# EAGLE board 4x4_keyboard_2.1 (EAGLE 9.6.2)
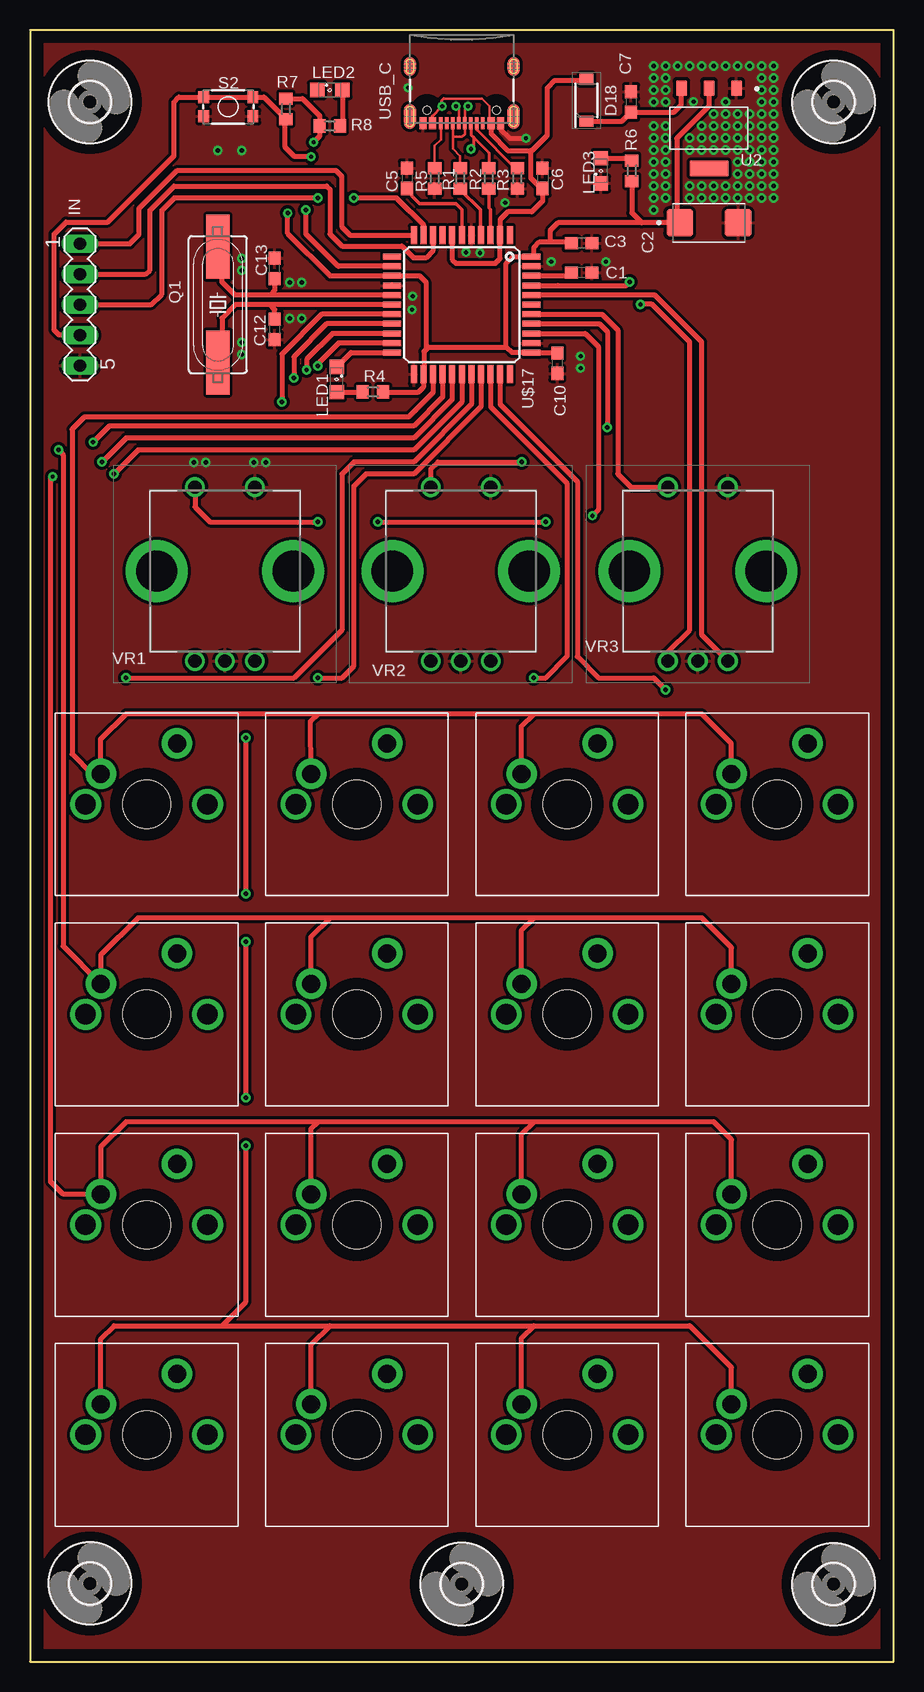
[diagram p0: board, top side]
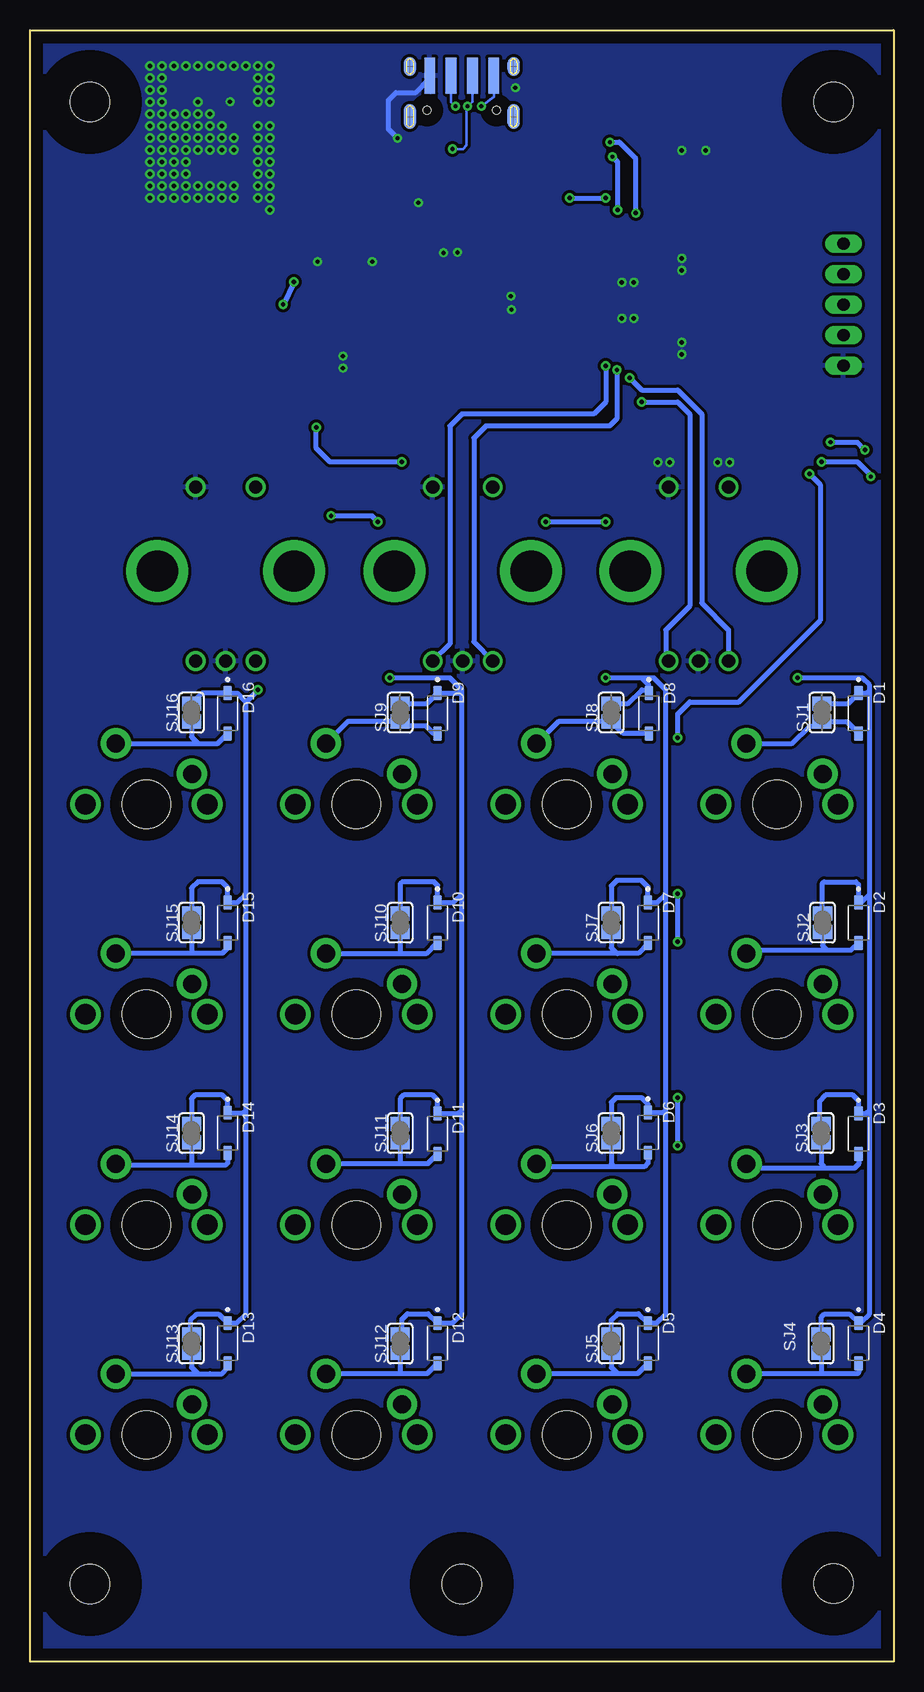
[diagram p1: board, bottom side, seen from below]

Size 72 x 136 mm. Coordinates in mm from the lower left corner, seen from the top.
Outline: 0,136 0,0 72,0 72,136 0,136
Copper layers (1*16): Top 0.035mm / dielectric 1.5mm / Bottom 0.035mm
Design rules "default": minimum track width 6mil, minimum drill 0.35mm, track to track 6mil, track to pad 6mil, pad to pad 6mil, via to via 6mil, smd to smd 6mil, copper to edge 40mil, drill to drill 6mil, minimum pad ring 10mil, minimum via ring 8mil, stop-mask expansion 4mil, vias tented up to drill 0mil, thermal gap 10mil

## Footprints (pad centres in the part's own frame; a part is rotated, then mirrored left to right if it is on the bottom)
C0603 = smd 1.1 x 1: 1 -0.85,0; 2 0.85,0
CAPPM6032X280N = smd 2.24 x 2.32: 1 -2.435,0; 2 2.435,0
SOD3715X135N = smd 1.21 x 0.73: A 1.68,0; C -1.68,0
SODFL3818X130N = smd 0.92 x 1.13: 1 -1.75,0; 2 1.75,0
3,3 = hole 3.3: 0,0
MA05-1 = drill 1.016 long: 1 -5.08,0; 2 -2.54,0; 3 0,0; 4 2.54,0; 5 5.08,0
USB-SOLDER-PADS = smd 3 x 0.9: D+ 0,-0.889; D- 0,0.889; GND 0,-2.667; VBUS 0,2.667
SML0805 = smd 1.2 x 1.2: A 1.05,0; C -1.05,0
HC49UP = smd 5.334 x 1.93: 1 -4.826,0; 2 4.826,0
R0603 = smd 1 x 1.1: 1 -0.85,0; 2 0.85,0
TACTILE_SWITCH_SMD_4.6X2.8MM = smd 0.9 x 1: 1 -2.05,-0.8; 2 2.05,-0.8; 3 2.05,0.8; 4 -2.05,0.8
SJ = smd 1.168 x 1.6: 1 -0.762,0; 2 0.762,0
SOT229P700X180-4N = smd 0.93 x 1.31: 1 -2.29,-3.345; 2 0,-3.345; 3 2.29,-3.345 | smd 3.24 x 1.31: 4 0,3.345
CHERRY-MX = drill 1.714 pad 1.93: P$3 -5.08,0; P$4 5.08,0 | drill 1.5 pad 2.54: SW1 -3.81,2.54; SW2 2.54,5.08 | hole 4: 0,0
TQFP44 = smd 1.5 x 0.5: 1 -5.8,4; 2 -5.8,3.2; 3 -5.8,2.4; 4 -5.8,1.6; 5 -5.8,0.8; 6 -5.8,0; 7 -5.8,-0.8; 8 -5.8,-1.6; 9 -5.8,-2.4; 10 -5.8,-3.2; 11 -5.8,-4; 23 5.8,-4; 24 5.8,-3.2; 25 5.8,-2.4; 26 5.8,-1.6; 27 5.8,-0.8; 28 5.8,0; 29 5.8,0.8; 30 5.8,1.6; 31 5.8,2.4; 32 5.8,3.2; 33 5.8,4 | smd 0.5 x 1.5: 12 -4,-5.8; 13 -3.2,-5.8; 14 -2.4,-5.8; 15 -1.6,-5.8; 16 -0.8,-5.8; 17 0,-5.8; 18 0.8,-5.8; 19 1.6,-5.8; 20 2.4,-5.8; 21 3.2,-5.8; 22 4,-5.8; 34 4,5.8; 35 3.2,5.8; 36 2.4,5.8; 37 1.6,5.8; 38 0.8,5.8; 39 0,5.8; 40 -0.8,5.8; 41 -1.6,5.8; 42 -2.4,5.8; 43 -3.2,5.8; 44 -4,5.8
USB-C-16P-5 = smd 0.3 x 1: A5 -1.25,-0.34; A6 -0.25,-0.34; A7 0.25,-0.34; A8 1.25,-0.34; B5 1.75,-0.34; B6 0.75,-0.34; B7 -0.75,-0.34; B8 -1.75,-0.34 | smd 0.6 x 1: GND -3.225,-0.34; GND2 3.225,-0.34; VBUS1 -2.45,-0.34; VBUS2 2.45,-0.34 | smd 1 x 2.1: SHLD1 -4.32,-0.915; SHLD2 4.32,-0.915 | smd 1 x 2.1 bottom: SHLD3 -4.32,-0.915; SHLD4 4.32,-0.915 | smd 1 x 1.6: SHLD5 -4.32,-5.095; SHLD8 4.32,-5.095 | smd 1 x 1.6 bottom: SHLD6 -4.32,-5.095; SHLD7 4.32,-5.095 | hole 0.65: -2.89,-1.445; 2.89,-1.445
PEC11R4220FS0024 = drill 1.1 pad 1.65: 1 0,0; 2 5,0; A1 0,-14.5; B1 5,-14.5; C1 2.5,-14.5 | drill 3.441 pad 5.161: MH1 -3.2,-7; MH2 8.2,-7

## Placement (x,y rotation side)
C1  0.1uF  [C0603]  46,115.78 180 top
C2  TAJC226K025RNJ  [CAPPM6032X280N]  56.61,119.93 0 top
C3  0.1uF  [C0603]  46,118.23 180 top
C5  1.0uF  [C0603]  31.43,123.64 270 top
C6  1.0uF  [C0603]  42.73,123.64 270 top
C7  10uF  [C0603]  50.11,130 270 top
C10  1.0uF  [C0603]  43.97,108.22 90 top
C12  22pF  [C0603]  20.4,111.04 270 top
C13  22pF  [C0603]  20.4,116.12 90 top
D1  1N4148W-13-F  [SOD3715X135N]  2.92,79.04 270 bottom
D2  1N4148W-13-F  [SOD3715X135N]  2.92,61.59 270 bottom
D3  1N4148W-13-F  [SOD3715X135N]  2.92,43.99 270 bottom
D4  1N4148W-13-F  [SOD3715X135N]  2.92,26.53 270 bottom
D5  1N4148W-13-F  [SOD3715X135N]  20.48,26.53 270 bottom
D6  1N4148W-13-F  [SOD3715X135N]  20.48,44.1 270 bottom
D7  1N4148W-13-F  [SOD3715X135N]  20.48,61.59 270 bottom
D8  1N4148W-13-F  [SOD3715X135N]  20.4,79.04 270 bottom
D9  1N4148W-13-F  [SOD3715X135N]  38.02,79.04 270 bottom
D10  1N4148W-13-F  [SOD3715X135N]  38.02,61.59 270 bottom
D11  1N4148W-13-F  [SOD3715X135N]  38.02,44 270 bottom
D12  1N4148W-13-F  [SOD3715X135N]  38.02,26.53 270 bottom
D13  1N4148W-13-F  [SOD3715X135N]  55.52,26.53 270 bottom
D14  1N4148W-13-F  [SOD3715X135N]  55.52,44.07 270 bottom
D15  1N4148W-13-F  [SOD3715X135N]  55.52,61.59 270 bottom
D16  1N4148W-13-F  [SOD3715X135N]  55.52,79.04 270 bottom
D18  1N4007W-T  [SODFL3818X130N]  46.4,130.13 90 top
H1  MOUNT-HOLE3.3  [3,3]  67,130 0 top
H2  MOUNT-HOLE3.3  [3,3]  5,130 0 top
H4  MOUNT-HOLE3.3  [3,3]  67,6.45 0 top
H5  MOUNT-HOLE3.3  [3,3]  5,6.51 0 top
H6  MOUNT-HOLE3.3  [3,3]  36,6.46 0 top
IN  [MA05-1]  4.17,113.11 270 top
JP14  USB_SOLDER_PADS  [USB-SOLDER-PADS]  36,132.21 270 bottom
LED1  Green  [SML0805]  25.57,106.86 270 top
LED2  Green  [SML0805]  25,131 0 top
LED3  [SML0805]  47.59,124.26 90 top
Q1  [HC49UP]  15.66,113.11 270 top
R1  5.1k  [R0603]  35.87,123.64 90 top
R2  5.1k  [R0603]  38.25,123.64 90 top
R3  5.1k  [R0603]  40.63,123.64 270 top
R4  1K  [R0603]  28.59,105.83 180 top
R5  5.1k  [R0603]  33.75,123.64 270 top
R6  1K  [R0603]  50.17,124.26 270 top
R7  1K  [R0603]  21.34,129.42 90 top
R8  1K  [R0603]  25,128 0 top
S2  Reset  [TACTILE_SWITCH_SMD_4.6X2.8MM]  16.53,129.6 0 top
SJ1  [SJ]  5.97,79.1 90 bottom
SJ2  [SJ]  5.91,61.59 90 bottom
SJ3  [SJ]  6.04,44.04 90 bottom
SJ4  [SJ]  6.04,26.5 90 bottom
SJ5  [SJ]  23.54,26.5 90 bottom
SJ6  [SJ]  23.54,44.04 90 bottom
SJ7  [SJ]  23.54,61.59 90 bottom
SJ8  [SJ]  23.54,79.1 90 bottom
SJ9  [SJ]  41.13,79.1 90 bottom
SJ10  [SJ]  41.13,61.59 90 bottom
SJ11  [SJ]  41.13,44.04 90 bottom
SJ12  [SJ]  41.13,26.5 90 bottom
SJ13  [SJ]  58.53,26.5 90 bottom
SJ14  [SJ]  58.53,44.04 90 bottom
SJ15  [SJ]  58.53,61.59 90 bottom
SJ16  [SJ]  58.53,79.1 90 bottom
U2  AMS1117-5.0  [SOT229P700X180-4N]  56.61,127.8 180 top
U$1  CHERRY-MX  [CHERRY-MX]  9.72,71.45 0 top
U$2  CHERRY-MX  [CHERRY-MX]  27.25,71.45 0 top
U$3  CHERRY-MX  [CHERRY-MX]  44.79,71.45 0 top
U$4  CHERRY-MX  [CHERRY-MX]  62.3,71.45 0 top
U$5  CHERRY-MX  [CHERRY-MX]  9.72,53.95 0 top
U$6  CHERRY-MX  [CHERRY-MX]  27.25,53.95 0 top
U$7  CHERRY-MX  [CHERRY-MX]  44.79,53.95 0 top
U$8  CHERRY-MX  [CHERRY-MX]  62.3,53.95 0 top
U$9  CHERRY-MX  [CHERRY-MX]  9.72,36.4 0 top
U$10  CHERRY-MX  [CHERRY-MX]  27.25,36.4 0 top
U$11  CHERRY-MX  [CHERRY-MX]  44.79,36.4 0 top
U$12  CHERRY-MX  [CHERRY-MX]  62.3,36.4 0 top
U$13  CHERRY-MX  [CHERRY-MX]  9.72,18.9 0 top
U$14  CHERRY-MX  [CHERRY-MX]  27.25,18.9 0 top
U$15  CHERRY-MX  [CHERRY-MX]  44.79,18.9 0 top
U$16  CHERRY-MX  [CHERRY-MX]  62.3,18.9 0 top
U$17  32U4  [TQFP44]  36,113.11 270 top
USB_C  [USB-C-16P-5]  36,127.87 180 top
VR1  PEC11R-4220F-S0024  [PEC11R4220FS0024]  13.75,97.9 0 top
VR2  PEC11R-4220F-S0024  [PEC11R4220FS0024]  33.42,97.9 0 top
VR3  PEC11R-4220F-S0024  [PEC11R4220FS0024]  53.18,97.9 0 top

## Library data of the parts
C1 C3 C5-C7 C10 C12 C13 = rcl; SPICEPREFIX: C
C2 = TAJC226K025RNJ; AVAILABILITY: In Stock; DESCRIPTION: 22 µF Molded Tantalum Capacitors 25 V 2312 (6032 Metric) 1.4Ohm; MF: AVX Interconnect / Elco; MP: TAJC226K025RNJ; PACKAGE: 2312 AVX Interconnect / Elco; PRICE: None; PURCHASE-URL: https://pricing.snapeda.com/search/part/TAJC226K025RNJ/?ref=eda
D1-D16 = 1N4148W-13-F; AVAILABILITY: In Stock; DESCRIPTION: Diode Standard 100 V 150mA Surface Mount SOD-123; MF: Diodes Inc.; MP: 1N4148W-13-F; PACKAGE: SOD-123 Fairchild Semiconductor; PRICE: None; PURCHASE-URL: https://pricing.snapeda.com/search/part/1N4148W-13-F/?ref=eda
D18 = 1N4007W-T; ARROW_PART_NUMBER: 1N4007W-T; ARROW_PRICE-STOCK: https://www.arrow.com/en/products/1n4007w-t/rectron?region=nac; DESCRIPTION: Rectifiers SOD-123,1A,1000V,GP; HEIGHT: 1.3mm; MANUFACTURER_NAME: Rectron; MANUFACTURER_PART_NUMBER: 1N4007W-T; MOUSER_PART_NUMBER: 583-1N4007W-T; MOUSER_PRICE-STOCK: https://www.mouser.co.uk/ProductDetail/Rectron/1N4007W-T?qs=QNEnbhJQKvah3J4JbJr%2FPw%3D%3D
H1 H2 H4-H6 = holes
IN = con-lstb; OC_FARNELL: unknown; OC_NEWARK: unknown
JP14 = SparkFun-Connectors
LED1-LED3 = led
Q1 = crystal; OC_FARNELL: unknown; OC_NEWARK: unknown
R1-R8 = audio amplifier example
S2 = SparkFun-Switches; PROD_ID: SWCH-13065
SJ1-SJ16 = jumper
U2 = AMS1117-5.0; AVAILABILITY: Not in stock; DESCRIPTION: Sot223/Pkg 1-Amp 5-Volt Low Drop Out Voltage Regulatator; MF: Advanced Monolithic Systems; MP: AMS1117-5.0; PACKAGE: SOT-223 Seeed Technology; PRICE: None
U$1-U$16 = cherrymx
U$17 = SparkFun-IC-Microcontroller; PROD_ID: IC-11161
USB_C = USBC
VR1-VR3 = PEC11R-4220F-S0024-RotaryEncoder; ALLIED_NUMBER: 70276555; DESCRIPTION: Bourns 24 Pulse Incremental Mechanical Rotary Encoder with a 6 mm Flat Shaft (Not Indexed), Through Hole; HEIGHT: 27.5mm; MANUFACTURER_NAME: Bourns; MANUFACTURER_PART_NUMBER: PEC11R-4220F-S0024; RS_PART_NUMBER: 7377767P; RS_PRICE-STOCK: http://uk.rs-online.com/web/p/products/7377767P

## Nets
A1: U$17.19 VR1.A1
A2: U$17.20 VR2.A1
A3: U$17.41 VR3.A1
AREF: C1.2 U$17.42
B1: U$17.18 VR1.B1
B2: U$17.21 VR2.B1
B3: U$17.40 VR3.B1
COL1: D1.C D2.C D3.C D4.C SJ1.2 SJ2.2 SJ3.2 SJ4.2 U$17.29
COL2: D5.C D6.C D7.C D8.C SJ5.2 SJ6.2 SJ7.2 SJ8.2 U$17.30
COL3: D9.C D10.C D11.C D12.C SJ9.2 SJ10.2 SJ11.2 SJ12.2 U$17.31
COL4: D13.C D14.C D15.C D16.C SJ13.2 SJ14.2 SJ15.2 SJ16.2 U$17.32
D+: R1.1 U$17.4
D-: R2.1 U$17.3
D-_HV: JP14.D- R2.2 USB_C.A7 USB_C.B7
DP_HV: JP14.D+ R1.2 USB_C.A6 USB_C.B6
GND: C1.1 C2.2 C3.1 C5.1 C6.1 C7.1 C10.1 C12.2 C13.2 IN.5 JP14.GND LED3.C R3.2 R5.2 S2.1 S2.2 U2.1 U$17.5 U$17.15 U$17.23 U$17.35 U$17.43 USB_C.GND USB_C.GND2 VR1.2 VR1.C1 VR2.2 VR2.C1 VR3.2 VR3.C1
MISO: IN.1 U$17.11
MOSI: IN.3 U$17.10
N$2: LED1.C U$17.22
N$3: D3.A SJ3.1 U$9.SW2
N$4: C7.2 D18.1 U2.3
N$5: LED1.A R4.2
N$6: D4.A SJ4.1 U$13.SW2
N$7: R3.1 USB_C.A5
N$8: D16.A SJ16.1 U$4.SW2
N$9: D11.A SJ11.1 U$11.SW2
N$10: D15.A SJ15.1 U$8.SW2
N$11: LED3.A R6.1
N$12: D14.A SJ14.1 U$12.SW2
N$13: R5.1 USB_C.B5
N$14: D13.A SJ13.1 U$16.SW2
N$15: D12.A SJ12.1 U$15.SW2
N$16: LED2.A R8.2
N$17: D10.A SJ10.1 U$7.SW2
N$19: D9.A SJ9.1 U$3.SW2
N$20: D5.A SJ5.1 U$14.SW2
N$21: D2.A SJ2.1 U$5.SW2
N$22: D6.A SJ6.1 U$10.SW2
N$23: D7.A SJ7.1 U$6.SW2
N$24: C13.1 Q1.1 U$17.16
N$25: D8.A SJ8.1 U$2.SW2
N$26: D1.A SJ1.1 U$1.SW2
N$27: C12.1 Q1.2 U$17.17
PRO_LED: U$17.12
PROG_LED: LED2.C
RESET: IN.4 R7.1 S2.3 S2.4 U$17.13
ROW1: U$1.SW1 U$2.SW1 U$3.SW1 U$4.SW1 U$17.25
ROW2: U$5.SW1 U$6.SW1 U$7.SW1 U$8.SW1 U$17.26
ROW3: U$9.SW1 U$10.SW1 U$11.SW1 U$12.SW1 U$17.27
ROW4: U$13.SW1 U$14.SW1 U$15.SW1 U$16.SW1 U$17.28
SCK: IN.2 U$17.9
SW1: U$17.36 VR1.1
SW2: U$17.37 VR2.1
SW3: U$17.38 VR3.1
UCAP: C5.2 U$17.6
V_USB: C6.2 D18.2 JP14.VBUS U$17.2 U$17.7 USB_C.VBUS1 USB_C.VBUS2
VCC: C2.1 C3.2 C10.2 R4.1 R6.2 R7.2 R8.1 U2.2 U$17.14 U$17.24 U$17.34 U$17.44

## Tracks (layer width: path | path; a pad name or v marks a point on that pad's centre or on a via)
A1  (via drill 0.35)
  Top 0.406: U$17.19 24.75,111.51 22,108.76 v22,107
  Bottom 0.406: VR1.A1 13.75,86 16,88.25 16,104 18,106 21,106 v22,107
A2  (via drill 0.35)
  Top 0.406: v23.07,107.67 23.07,108.56 25.22,110.71 U$17.20
  Bottom 0.406: VR2.A1 35,84.98 35,102 34,103 25.35,103 25,103 23.67,103 23.07,103.6 v23.07,107.67
A3  (via drill 0.35)
  Top 0.406: VR3.A1 53.18,84.18 55,86 55,110 51.87,113.13 v50.91,113.13 | U$17.41 43.99,114.71 44.03,114.67 49.67,114.67 v50,115
  Bottom 0.406: v50.91,113.13 50.87,113.13 v50,115
AREF
  Top 0.406: U$17.42 44.7,115.51 C1.2
B1  (via drill 0.35)
  Top 0.406: U$17.18 24.31,112.31 21,109 v21,105
  Bottom 0.406: VR1.B1 19,83.64 19,86 17,88 17,104 18,105 v21,105
B2  (via drill 0.35)
  Top 0.406: v24,108 24,108.19 25.72,109.91 U$17.21
  Bottom 0.406: v24,108 24,105 25,104 36,104 37,103 37,84.82 VR2.B1
B3
  Top 0.406: VR3.B1 56,85.58 56,110 52.09,113.91 U$17.40
COL1  (via drill 0.35)
  Top 0.406: v8,82 22,82 26,86 26,99 27,100 32,100 36.8,104.8 U$17.29
  Bottom 0.406: SJ1.2 3.78,79.86 D1.C 2.28,80.72 2,81 | SJ2.2 5.92,62.36 5.92,64.87 5.79,65 3.13,65 2.92,64.78 D2.C 2.73,63.27 2,64 | SJ3.2 6.18,44.95 6.18,46.71 5.67,47.22 3.38,47.22 2.92,46.75 D3.C 2.33,45.67 2,46 | SJ4.2 6.05,27.28 6.05,28.67 5.79,28.93 3.63,28.93 D4.C 2.79,28.21 2,29 2,46 | 2,46 2,64 | 2,64 2,81 | 2,81 2,81.38 2.62,82 v8,82
COL2  (via drill 0.35)
  Top 0.406: v24,82 26,82 27,83 27,98 28,99 32,99 37.6,104.6 U$17.30
  Bottom 0.406: SJ8.2 22.14,79.86 21,81 20.68,81 D8.C 20.4,81.4 21,82 | SJ5.2 23.54,28.46 23,29 21.27,29 D5.C 19.79,28.21 19,29 19,46 | SJ6.2 23.54,46.62 23.16,47 21,47 20.48,46.47 D6.C 19.22,45.78 19,46 | SJ7.2 23.54,64.65 23.07,65.12 21.04,65.12 20.48,64.56 D7.C 19.73,63.27 19,64 | 19,46 19,64 | 19,64 19,81 20,82 21,82 | 21,82 v24,82
COL3  (via drill 0.35)
  Top 0.406: U$17.31 38.4,104.6 44.76,98.24 44.76,83.76 43,82 v42,82
  Bottom 0.406: SJ9.2 38.88,79.86 D9.C 36.28,80.72 36,81 | SJ12.2 41,27.4 41,28.52 40.52,29 38.81,29 D12.C 36.79,28.21 36,29 36,46 | SJ10.2 41.13,64.84 40.97,65 38.31,65 38.02,64.71 D10.C 36.73,63.27 36,64 | SJ11.2 41.13,46.93 40.85,47.22 38.43,47.22 38.02,46.8 D11.C 36.33,45.67 36,46 | 36,46 36,64 | 36,64 36,81 | 36,81 37,82 v42,82
COL4  (via drill 0.35)
  Top 0.406: U$17.32 39.2,104.8 45.63,98.37 45.63,83.76 47.4,82 52,82 v53,81
  Bottom 0.406: SJ16.2 57.67,80.72 D16.C 54.72,80.72 54,80 | SJ13.2 58.63,27.36 58.63,28.42 58.12,28.93 56.24,28.93 D13.C 54.79,28.21 54,29 54,46 | SJ14.2 58.53,46.93 58.25,47.22 55.96,47.22 55.52,46.78 D14.C 54.25,45.75 54,46 | SJ15.2 58.53,64.47 58,65 56,65 55.52,64.52 D15.C 54.73,63.27 54,64 | 54,46 54,64 | 54,64 54,80 | 54,80 v53,81
D+
  Top 0.305: U$17.4 37.55,118.96 37.55,121 35.87,122.68 R1.1
D-
  Top 0.305: R2.1 38.25,121.18 38.4,121.04 U$17.3
D-_HV  (via drill 0.35)
  Top 0.2: USB_C.A7 35.77,128.23 35.77,129.38 v35.51,129.64
  Top 0.254: USB_C.B7 36.78,128.18 36.78,127.23 37.01,127 | R2.2 38.25,125.75 37.01,127 | v36.78,126.08 37.01,126.3 37.01,127
  Bottom 0.2: JP14.D- 35.11,130.04 v35.51,129.64 35.59,129.56 35.59,126.38 35.89,126.08 v36.78,126.08
DP_HV  (via drill 0.35)
  Top 0.2: v36.53,129.64 36.25,129.36 USB_C.A6 36.25,127.33 36.02,127.1 35.39,127.1 35.25,127.24 | 35.25,127.24 USB_C.B6 | 35.25,127.24 35.25,126.09 35.87,125.47 R1.2
  Bottom 0.2: JP14.D+ 36.89,130 v36.53,129.64
GND  (via drill 0.35)
  Top 0.152: USB_C.GND 39.23,127.75
  Top 0.406: v41.35,126.97 40,126.97 39.23,127.75
  Bottom 0.406: JP14.GND 38.67,131.95 39.83,130.78 41.48,130.78 42.12,130.15 42.12,127.73 v41.35,126.97
  other vias: 52,128 52,127 52,126 52,125 31.53,131.2 52,124 52,123 52,122 53,122 53,123 53,124 53,125 53,126 53,127 53,128 53,130 53,131 53,132 53,133 52,133 52,132 52,131 52,130 54,133 55,133 56,133 57,133 58,133 59,133 60,133 61,133 61,131 61,132 61,130 61,129 61,128 61,127 61,126 61,125 61,124 61,123 61,122 60,122 59,122 58,122 57,122 56,122 55,122 55,123 56,123 57,123 58,123 59,123 60,123 60,124 59,124 59,125 59,126 59,127 59,128 59,129 60,129 60,128 60,127 60,126 60,125 58,126 57,126 56,126 55,126 55,127 56,127 57,127 58,127 58,128 57,128 56,128 57,129 58,129 58,130 36.36,117.47 37.52,117.42 48.03,116.68 43.46,116.68 31.91,113.8 31.87,112.68 21.66,114.96 22.66,114.96 21.66,111.96 22.66,111.96 17.66,108.96 17.66,109.96 18.66,99.96 14.66,99.96 13.66,99.96 19.66,99.96 45.91,108.8 45.91,107.8 15.66,125.96 17.66,125.96 39.62,121.59 17.66,115.96 17.66,116.96 62,133 62,132 62,131 62,130 62,129 62,128 62,127 62,126 62,125 62,124 62,123 62,122 55.33,130.02 52,121
  pour Bottom (isolate 0.254): 0,136 72,136 72,0 0,0
  pour Top (isolate 0.254): 0,136 72,136 72,0 0,0
MISO
  Top 0.406: IN.1 8.31,118.19 9.1,118.97 9.1,121.13 12.27,124.31 25.48,124.31 25.99,123.8 25.99,119.61 26.69,118.91 U$17.11
MOSI  (via drill 0.35)
  Top 0.406: U$17.10 32.8,119.78 30.58,122 v27,122 | IN.3 10.11,113.11 11,114 11,121 12,122 v24,122
  Bottom 0.406: v27,122 v24,122
N$2
  Top 0.406: LED1.C 26.76,109.11 U$17.22
N$3
  Bottom 0.406: D3.A 2.92,41.46 3.26,41.12 5.67,41.12 | 5.67,41.12 11.9,41.12 U$9.SW2 | SJ3.1 6.04,41.49 5.67,41.12
N$4
  Top 0.406: U2.3 54.31,131.13 54.31,129.77 53.69,129.15 C7.2 49.34,128.38 D18.1
N$5
  Top 0.406: LED1.A 25.59,105.83 R4.2
N$6
  Bottom 0.406: D4.A 2.92,24.09 3.02,23.98 6,23.98 | 6,23.98 U$13.SW2 | SJ4.1 6.04,24.02 6,23.98
N$7
  Top 0.254: USB_C.A5 37.25,127.67 40.43,124.49 R3.1
N$8
  Bottom 0.406: U$4.SW2 58,76.53 | 58,76.53 56.35,76.53 D16.A | SJ16.1 58.53,77.07 58,76.53
N$9
  Bottom 0.406: D11.A 38.02,42.3 38.84,41.48 41,41.48 | 41,41.48 U$11.SW2 | SJ11.1 41.13,41.61 41,41.48
N$10
  Bottom 0.406: D15.A 55.52,59.47 55.96,59.03 58.37,59.03 | 58.37,59.03 64.79,59.03 U$8.SW2 | SJ15.1 58.53,59.19 58.37,59.03
N$11
  Top 0.406: LED3.A 49.97,125.31 R6.1
N$12
  Bottom 0.406: D14.A 55.52,41.56 55.71,41.37 58.37,41.37 | 58.37,41.37 64.73,41.37 U$12.SW2 | SJ14.1 58.53,41.53 58.37,41.37
N$13
  Top 0.2: USB_C.B5 34.25,126.85 33.75,126.35 R5.1
N$14
  Bottom 0.406: U$16.SW2 58,23.98 | 58,23.98 57.02,23.98 57,24 56,24 55.52,24.48 D13.A | SJ13.1 58.53,24.51 58,23.98
N$15
  Bottom 0.406: D12.A 38.89,23.98 41,23.98 | 41,23.98 U$15.SW2 | SJ12.1 41.13,24.11 41,23.98
N$16
  Top 0.406: LED2.A 26.05,128.2 R8.2
N$17
  Bottom 0.406: D10.A 38.09,59.91 39,59 41,59 | 41,59 47.3,59 U$7.SW2 | SJ10.1 41.13,59.13 41,59
N$19
  Bottom 0.406: D9.A 38.36,77.36 39,78 40.8,78 SJ9.1 45.52,78.34 U$3.SW2
N$20
  Bottom 0.406: D5.A 21.34,23.98 23,23.98 | 23,23.98 U$14.SW2 | SJ5.1 23.54,24.52 23,23.98
N$21
  Bottom 0.406: D2.A 3.54,59.28 5.54,59.28 | U$5.SW2 12.01,59.28 5.54,59.28 | SJ2.1 5.91,59.65 5.54,59.28
N$22
  Bottom 0.406: D6.A 20.48,41.55 20.78,41.25 23.32,41.25 | 23.32,41.25 29.56,41.25 U$10.SW2 | SJ6.1 23.54,41.46 23.32,41.25
N$23
  Bottom 0.406: SJ7.1 23.54,59.5 23.07,59.03 | D7.A 20.48,59.84 21.29,59.03 23,59.03 23.07,59.03 | 23.07,59.03 U$6.SW2
N$24
  Top 0.406: U$17.16 20,113.91 | 20,113.91 17.09,113.91 16,115 16,117.59 Q1.1 | C13.1 20.4,114.31 20,113.91
N$25
  Bottom 0.406: D8.A 22.56,77.36 SJ8.1 27.93,78.34 U$2.SW2
N$26
  Bottom 0.406: U$1.SW2 8.47,76.53 7,78 6.3,78 SJ1.1 3.89,78.34 D1.A
N$27
  Top 0.406: U$17.17 20,113.11 | 20,113.11 17.11,113.11 16,112 16,108.62 Q1.2 | C12.1 20.4,112.71 20,113.11
RESET  (via drill 0.35)
  Top 0.406: IN.4 2.43,110.57 2,111 2,119 3,120 6.49,120 12,125.51 12,130 12.4,130.4 S2.4 S2.3 19.51,130.4 R7.1 21.34,128.32 21.29,128.27 21.29,126.21 22.05,125.45 v23.45,125.45 | U$17.13 25.69,116.31 23,119 v23,121
  Bottom 0.406: v23,121 23,125 v23.45,125.45
ROW1
  Top 0.406: 5.87,74 5.14,74 3.51,75.63 3.51,102.72 4.53,103.73 31.58,103.73 33.6,105.75 U$17.25 | 5.87,74 U$1.SW1 | U$4.SW1 58.46,76.54 56,79 42,79 | 42,79 24,79 | 24,79 8,79 5.87,76.87 5.87,74 | U$2.SW1 23.39,78.39 24,79 | U$3.SW1 40.98,77.97 42,79
ROW2  (via drill 0.35)
  Top 0.406: v2.38,101 2.76,100.62 2.76,59.64 U$5.SW1 5.91,58.91 9,62 25,62 | U$17.26 34.4,105.4 32,103 6.62,103 v5.25,101.63 | U$8.SW1 58.49,59.51 56,62 42,62 | 42,62 25,62 | U$6.SW1 23.44,60.44 25,62 | U$7.SW1 40.98,60.98 42,62
  Bottom 0.406: v2.38,101 3.02,101.63 v5.25,101.63
ROW3  (via drill 0.35)
  Top 0.406: v1.9,98.76 1.73,98.59 1.73,40 2.79,38.94 U$9.SW1 5.91,42.91 8,45 24,45 | U$17.27 35.2,105.2 32,102 8,102 v6,100 | U$12.SW1 58.49,43.51 57,45 42,45 | 42,45 24,45 | U$10.SW1 23.44,44.44 24,45 | U$11.SW1 40.98,43.98 42,45
  Bottom 0.406: v1.9,98.76 1.9,98.9 3,100 v6,100
ROW4  (via drill 0.35)
  Top 0.406: U$17.28 36,105 32,101 9,101 v7,99 | U$16.SW1 58.49,24.51 55,28 42,28 | U$13.SW1 5.91,26.91 7,28 16,28 | 16,28 25,28 | 25,28 42,28 | U$15.SW1 40.98,26.98 42,28 | U$14.SW1 23.44,26.44 25,28 | 16,28 18,30 v18,43 | v18,47 v18,60 | v18,64 v18,77
  Bottom 0.406: v18,43 v18,47 | v18,60 v18,64 | v18,77 18,79 17,80 12.89,80 6.11,86.78 6.11,98.11 v7,99
SCK
  Top 0.406: IN.2 9.65,115.65 10,116 10,121 12,123 24.75,123 25,122.75 25,119 26,118 31,118 32,117 33,117 33.6,117.6 U$17.9
SW1  (via drill 0.35)
  Top 0.406: U$17.36 46.29,110.71 47.38,109.62 47.38,96 v46.89,95.51 | VR1.1 13.75,96.25 15,95 v24,95 | v29,95 v43,95
  Bottom 0.406: v24,95 v29,95 | v46.89,95.51 43.51,95.51 v43,95
SW2  (via drill 0.35)
  Top 0.406: U$17.37 47.49,111.51 48.13,110.87 v48.13,102.87 | VR2.1 33.42,99.42 34,100 v41,100
  Bottom 0.406: v48.13,102.87 48.13,101.13 47,100 v41,100
SW3
  Top 0.406: U$17.38 47.69,112.31 49,111 49,99 50.1,97.9 VR3.1
UCAP
  Top 0.305: C5.2 31.84,122.16 32,122 32,121.98 32.47,121.51 35.51,121.51 36.02,121 36.02,118.93 U$17.6
V_USB  (via drill 0.35)
  Top 0.2: 34.5,130.27 37.67,130.27 38.31,129.64 38.31,128.36 USB_C.VBUS1 | USB_C.VBUS2 33.55,128.69
  Top 0.254: 34.5,130.27 34.37,130.15 v34.37,129.64 33.55,128.82 33.55,128.69
  Top 0.406: U$17.7 35.2,116.87 35.51,116.56 38.81,116.56 39.2,116.94 U$17.2 39.2,120.2 39.84,120.84 41.84,120.84 42.73,121.74 C6.2 | C6.2 | 41.74,125.96 41.74,123.67 42.62,122.78 C6.2 | USB_C.VBUS1 38.45,127.34 39.83,125.96 41.74,125.96 | 41.74,125.96 41.86,125.96 43.13,127.23 43.13,131.16 43.77,131.8 46.32,131.8 D18.2
  Bottom 0.2: v34.37,129.64 33.33,130.42 JP14.VBUS
VCC  (via drill 0.35)
  Top 0.406: 39.7,109.57 40.17,109.11 U$17.34 43.97,109.11 C10.2 | 39.7,109.57 39.7,116.56 40.21,117.07 41.76,117.07 U$17.44 42,117.11 42,117.84 42.5,118.34 43.39,118.34 | 39.7,109.57 33.23,109.57 33,109.35 | R4.1 32.41,105.83 32.8,106.22 U$17.24 32.85,107.35 32.85,109.19 33,109.35 | U2.2 56.61,129.65 53.93,126.97 53.93,120.18 C2.1 51,119.93 | 51,119.93 44,119.93 43.37,119.25 43.37,118.36 43.39,118.34 | 33,109.35 33,115 32.49,115.51 U$17.14 25.01,115.51 21.49,119.02 v21.49,120.75 | R6.2 50.17,120.76 51,119.93 | 43.39,118.34 45.04,118.34 C3.2 | R7.2 22.73,130.27 24.15,128.85 R8.1 24.15,127.15 v23.65,126.65
  Bottom 0.406: v21.49,120.75 21.49,125.27 22.87,126.65 v23.65,126.65